# Altium PCB Arduino幻彩灯带.PcbDoc
Units mm, origin at the board's own origin, x right, y up, seen from the top; angles counter-clockwise.
Board outline 68.83 x 53.59 mm, 2 copper layers (Top Layer, Bottom Layer); 35 components, 34 nets, 125 pads, 205 vias.
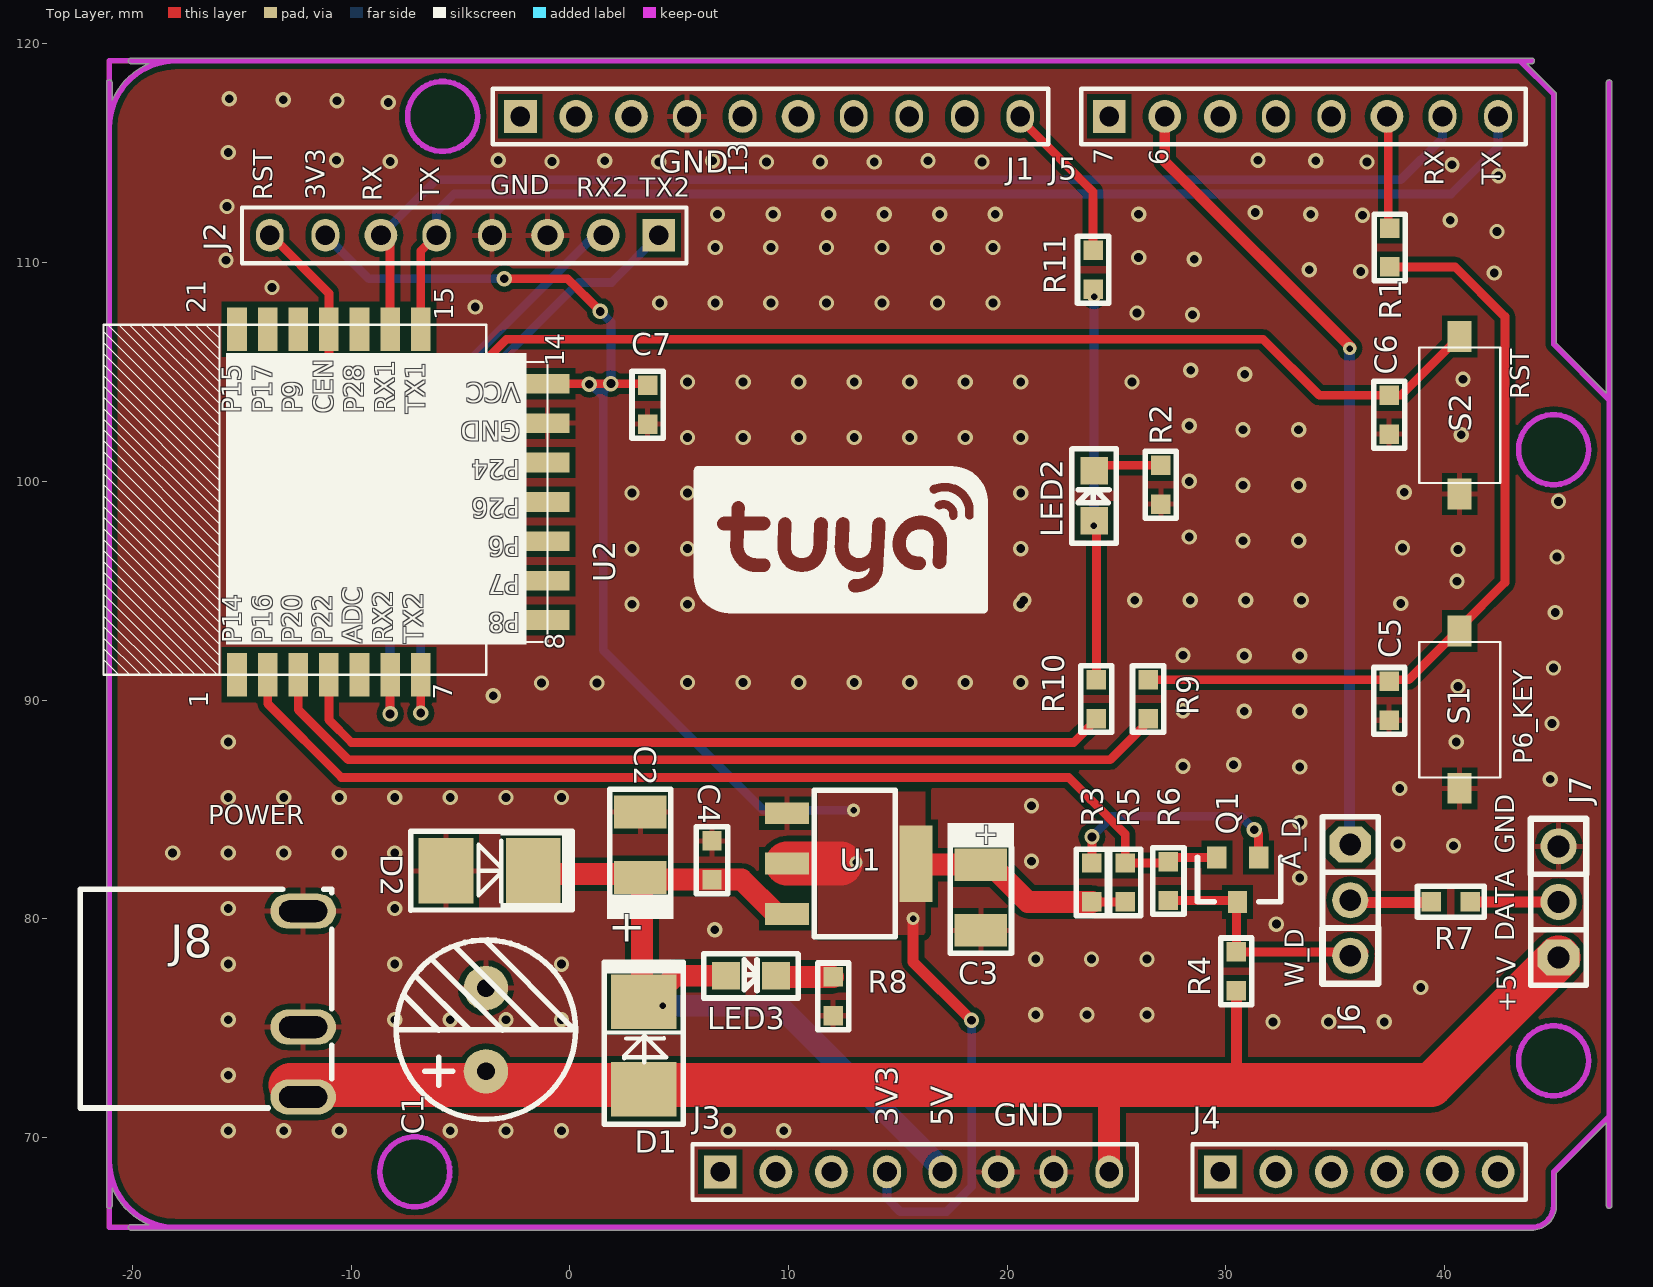
[diagram p0: Top Layer view]
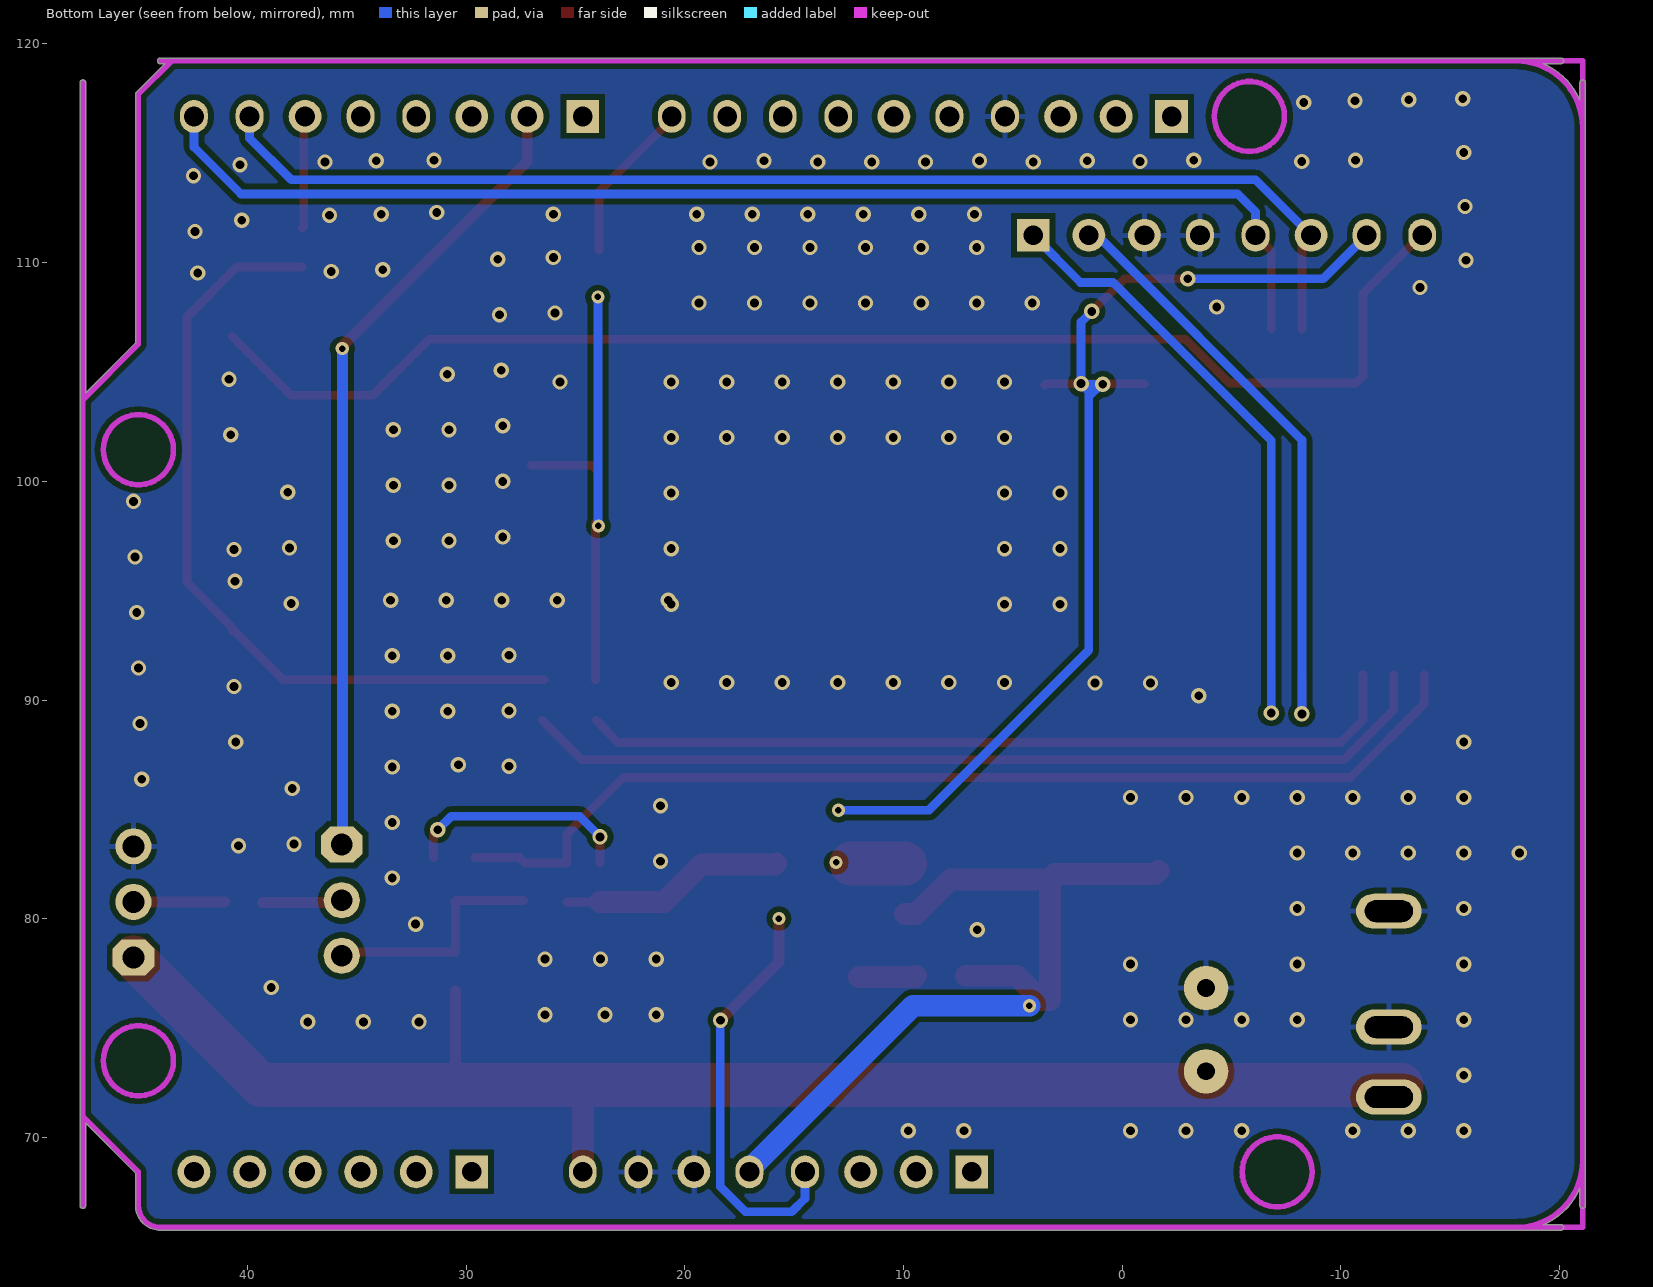
[diagram p1: Bottom Layer view, seen from below]

## Layer stack, top to bottom
Top Solder: solder mask 0.0102, Solder Resist, Dk 3.5
Top Layer: signal copper 0.0356
Dielectric1: dielectric 0.32, FR-4, Dk 4.8
Bottom Layer: signal copper 0.0356
Bottom Solder: solder mask 0.0102, Solder Resist, Dk 3.5

## Board outline
-21.184,66.888 ccw(c-21.057,66.888) -20.929,66.888 -20.929,67.689 ccw(c-18.009,68.936) -19.255,66.015 -20.057,66.015 ccw(c-20.057,65.888) -20.057,65.76 43.983,65.76 ccw(c43.983,66.888) 45.111,66.888 ccw(c44.983,66.888) 45.111,66.888 45.111,68.375 47.396,70.66 47.396,66.888 ccw(c47.523,66.888) 47.651,66.888 47.651,118.228 ccw(c47.523,118.228) 47.396,118.228 47.396,104.041 45.111,106.326 45.111,117.704 ccw(c44.983,117.704) 45.073,117.794 43.767,119.1 43.983,119.1 ccw(c43.983,119.228) 44.111,119.228 ccw(c43.983,119.228) 43.983,119.355 -20.057,119.355 ccw(c-20.057,119.228) -20.057,119.1 -19.255,119.1 ccw(c-18.009,116.18) -20.929,117.426 -20.929,118.228 ccw(c-21.057,118.228) -21.184,118.228

## Design rules (kind name [scope] priority, off if disabled: settings)
Clearance Clearance_1 [All] p1: gap=0.254 ignorepadtopadclearanceinfootprint=FALSE except(0: Arc-Hole Track-Hole SMDPad-Hole THPad-Hole Via-Hole Fill-Hole Poly-Hole Region-Hole Text-Hole)
Clearance [InNet('GND') vs InNetClass('All Nets')] p2: gap=0.203 ignorepadtopadclearanceinfootprint=FALSE except(0: Arc-Hole Track-Hole SMDPad-Hole THPad-Hole Via-Hole Fill-Hole Poly-Hole Region-Hole Text-Hole)
HoleSize [All] p1: absolutevalues=TRUE maxlimit=3 minlimit=0.025 maxpercent=80.000 minpercent=20.000
HoleToHoleClearance [All] p1: gap=0 allowstackedmicrovias=TRUE
MinimumSolderMaskSliver [All] p1: minsoldermaskwidth=0
PolygonConnect PolygonConnect_5 [InNet('+3.3V') vs IsPad] p1: connectstyle=Direct reliefconductorwidth=0.254 reliefentries=4 polygonreliefangle="90 Angle" airgapwidth=0.254
PolygonConnect PolygonConnect_4 [InNet('+3.3V') vs IsVia] p2: connectstyle=Direct reliefconductorwidth=0.254 reliefentries=4 polygonreliefangle="90 Angle" airgapwidth=0.254
PolygonConnect PolygonConnect_3 [InNet('+5V') vs IsVia] p3: connectstyle=Direct reliefconductorwidth=0.254 reliefentries=4 polygonreliefangle="90 Angle" airgapwidth=0.254
PolygonConnect PolygonConnect_2 [InNet('+5V') vs IsPad] p4: connectstyle=Direct reliefconductorwidth=0.254 reliefentries=4 polygonreliefangle="90 Angle" airgapwidth=0.254
PolygonConnect PolygonConnect_1 [InNet('GND') vs IsVia] p5: connectstyle=Direct reliefconductorwidth=0.254 reliefentries=4 polygonreliefangle="90 Angle" airgapwidth=0.254
PolygonConnect [All] p6: connectstyle=Relief reliefconductorwidth=0.254 reliefentries=4 polygonreliefangle="90 Angle" airgapwidth=0.254
RoutingVias [All] p1: holewidth=0.2 width=1.27 viastyle="Through Hole" minholewidth=0.2 minwidth=0.2 maxholewidth=1.2 maxwidth=1.27
SilkToSilkClearance [All] p1: silktosilkclearance=0
SilkToSolderMaskClearance SilkscreenOverComponentPads [IsPad] p1: minsilkscreentomaskgap=0 clearancetoexposedcopper=TRUE
SolderMaskExpansion [All] p1: expansion=0.102
Width [All] p1: maxlimit=6 minlimit=0.254 preferedwidth=0.254
25 further rules are at their usual default settings.

## Components (designator, comment, footprint, x,y, rotation, side; value= is the part's Value field where it differs from the comment)
C1 "220uF±20%/16V" CD0.15 -3.835,74.93 r90 top
C2 "22uF±20%/16V" 钽电容B3528 3.226,83.387 r90 top
C3 "22uF±20%/16V" 钽电容B3528 18.796,80.974 r270 top
C4 "0.1uF±20%/50V" C0603 6.502,81.788 r90 top
C5 "0.1uF±20%/16V" C0603 37.465,89.078 r90 top
C6 "0.1uF±20%/16V" C0603 37.465,103.937 r270 top
C7 "0.1uF±20%/16V" C0603 3.556,102.616 r90 top
D1 "SS210" SMA(DO-214AC) 3.378,74.2 r90 top
D2 "SMBJ05CA" SMB(DO-214AA) -3.664,82.194 r0 top
J1 "CON10" HDR1X10Z -2.261,116.688 r0 top
J2 "CON8" HDR1X8Z 4.064,111.252 r180 top
J3 "CON8" HDR1X8Z 6.883,68.428 r0 top
J4 "CON6" HDR1X6Z 29.743,68.428 r0 top
J5 "CON8" HDR1X8Z 24.663,116.688 r0 top
J6 "KF301-3P" "SIP3 - 2.54" 35.687,83.388 r270 top
J7 "KF301-3P" "SIP3 - 2.54" 45.212,78.232 r90 top
J8 "DCIN" DC-IN-TH_DC-044-20A -12.192,76.098 r270 top
LED2 "LED" LED0805_1 23.978,98.196 r90 top
LED3 "LED" LED0805_1 7.137,77.394 r0 top
Q1 "S8050" SOT-23-NPN 31.496,82.804 r180 top
R1 "0R±5%" R0603#1 37.49,111.582 r270 top
R2 "1K±5%" R0603#1 27.026,100.736 r270 top
R3 "2K±5%" R0603#1 23.876,80.772 r90 top
R4 "2K±5%" R0603#1 30.48,76.708 r90 top
R5 "2K±5%" R0603#1 25.4,80.772 r90 top
R6 "NC/0R" R0603#1 27.374,82.614 r270 top
R7 "1R±5%" R0603#1 39.395,80.772 r0 top
R8 "240R±5%" R0603#1 12.04,77.343 r270 top
R9 "0R±5%" R0603#2 25.044,91.313 r270 top
R10 "0R±5%" R0603#2 22.682,91.313 r270 top
R11 "0R±5%" R0603#2 25.324,108.407 r90 top
S1 "KEY_SW2" 3*6*2.5-SM 40.691,89.56 r90 top
S2 "KEY_SW2" 3*6*2.5-SM 40.691,103.022 r90 top
U1 "GM1117-3.3ST3T" SOT-223 12.878,82.525 r270 top
U2 "WIFI_BLE_CBU" WIFI_BLE_CBU -1.016,99.06 r90 top

## Footprints (in the part's own frame and the unit in brackets; to place one, negate y for a bottom-side part, rotate by r counter-clockwise, add the part's x,y. Pads: shape width x height; smd on the part's side, far side on the other; paste and mask are expansions set on the pad)
3*6*2.5-SM [mm]
  rect 1.4x1.1 smd: 1(-3.6,0) 2(3.6,0)
  silkscreen extent -3.1,-1.85 3.1,1.85
C0603 [mil]
  rect 35x35 smd: 1(0,0) 2(70,0)
  silkscreen extent -25,-28 95,28, body extent 4,-16 66,15, height 12
CD0.15 [mil]
  round 80 hole 32: 1(-75,0) 2(75,0)
  silkscreen extent -161,-161 161,161, body extent -156,-150 158,165, height 630
DC-IN-TH_DC-044-20A [mm] "11.5*9.5mm"
  oval 1.6x3 hole 1 slot 2.2 at 90 deg: 1(4.25,0) 2(-4.25,0) 3(1.05,0)
  silkscreen extent -5.25,-10.2 4.75,1.3
HDR1X6Z [mm] "Connector; Header; 5 Position"
  rect 1.5x1.5 hole 0.9: 1(0,0)
  round 1.5 hole 0.9: 2(2.54,0) 3(5.08,0) 4(7.62,0) 5(10.16,0) 6(12.7,0)
  silkscreen extent -1.27,-1.27 13.97,1.27, body extent -1.27,-1.25 13.97,1.25, height 8.65
HDR1X8Z [mm] "Connector; Header; 8 Position"
  rect 1.5x1.5 hole 0.9: 1(0,0)
  round 1.5 hole 0.9: 2(2.54,0) 3(5.08,0) 6(12.7,0)
  oval 1.27x1.5 hole 0.9: 4(7.62,0) 5(10.16,0) 7(15.24,0) 8(17.78,0)
  silkscreen extent -1.27,-1.27 19.05,1.27, body extent -1.27,-1.25 19.05,1.25, height 8.65
HDR1X10Z [mm] "Connector; Header; 10 Position"
  rect 1.5x1.5 hole 0.9: 1(0,0)
  round 1.5 hole 0.9: 2(2.54,0) 3(5.08,0) 6(12.7,0)
  oval 1.27x1.5 hole 0.9: 4(7.62,0) 5(10.16,0) 7(15.24,0) 8(17.78,0) 9(20.32,0) 10(22.86,0)
  silkscreen extent -1.27,-1.27 24.13,1.27, body extent -1.27,-1.25 24.13,1.25, height 8.65
LED0805_1 [mil]
  rect 50x50 smd: 1(0,0) 2(90,0)
  silkscreen extent -40,-40 130,40, body extent 6,-25 84,24, height 30
R0603#1 [mil]
  rect 35x35 smd: 1(0,0) 2(70,0)
  silkscreen extent -25,-28 95,28, body extent 2,-16 65,16, height 18
R0603#2 [mil]
  rect 35x35 smd: 1(85,55) 2(15,55)
  silkscreen extent -10,27 110,83, body extent 20,39 83,71, height 18
"SIP3 - 2.54" [mil]
  oct 65x75 hole 39.37: 1(0,0)
  round 65 hole 39.37: 2(100,0) 3(200,0)
  silkscreen extent -50,-50 250,50
SMA(DO-214AC) [mm]
  rect 2.5x3 smd: 1(-2,0) 2(2,0)
  silkscreen extent -3.6,-1.84 3.94,1.83, body extent -2.21,-1.38 2.46,1.27, height 2.35
SMB(DO-214AA) [mm]
  rect 2.5x3 smd: 1(-2,0) 2(2,0)
  silkscreen extent -3.6,-1.8 3.91,1.82, body extent -2.28,-1.33 2.39,1.32, height 2.35
SOT-23-NPN [mil]
  rect 35x40 smd: 1(75,0) 2(0,0) 3(38,80)
  silkscreen extent -40,0 110,80, body extent -17,-17 97,80, height 39
SOT-223 [mm]
  rect 1x2 smd: 1(-2.3,-2.95) 2(0,-2.95) 3(2.3,-2.95)
  rect 3.5x1.5 smd: 2(0,2.95)
  silkscreen extent -3.35,-1.71 3.35,1.99, body extent -3.29,-3.55 3.21,3.41, height 1.65
WIFI_BLE_CBU [mm]
  rect 2x0.9 smd: 1(-7.9,14.2) 2(-7.9,12.8) 3(-7.9,11.4) 4(-7.9,10) 5(-7.9,8.6) 6(-7.9,7.2) 7(-7.9,5.8) 15(7.9,5.8) 16(7.9,7.2) 17(7.9,8.6) 18(7.9,10) 19(7.9,11.4) 20(7.9,12.8) 21(7.9,14.2)
  rect 0.9x2 smd: 8(-5.4,0) 9(-3.6,0) 10(-1.8,0) 11(0,0) 12(1.8,0) 13(3.6,0) 14(5.4,0)
  silkscreen extent -7.9,0 8.14,20.33
钽电容B3528 [mm]
  rect 1.5x2.4 smd: 1(-1.5,0) 2(1.5,0)
  silkscreen extent -3.4,-1.52 2.54,1.52

## Part data
C1 C2 C3: library part "CAPACITOR POL", "Capacitor"
C4 C5 C6 C7: library part CAP, "Capacitor"
D1: library part Diode1, "Diode"
D2: library part "D Schottky", "Schottky Diode", MFR=Toshiba
J1 J2 J3 J4 J5: "Connector"
J6 J7: library part CON3, "Connector"
J8: library part DC
Q1: library part NPN, "NPN Transistor"
R1 R2 R3 R4 R5 R6 R7 R8 R9 R10 R11: library part RES5
U1: library part GM1117
U2: "Module"

## Via types
v1: diameter 0.7, hole 0.4, Top Layer to Bottom Layer, tented both sides, 198 vias
v2: diameter 0.6, hole 0.3, Top Layer to Bottom Layer, 7 vias

## Nets (pads, with @x,y where several pads share a name; then routed paths per layer and width w, separated by ;. In a path a pad name is that pad's centre, name@x,y a point inside that pad or via, vN(x,y) a via of type N, cw(c..) or ccw(c..) an arc to the next point about the centre after c; other vN are vias at no path point)
+3.3V: C3.1 C7.2 J2.7 J3.4 R3.1 R5.1 U1.2 U2.14 | length 82.6
  Top Layer w0.4: v1(-2.997,109.271) -0.102,109.271 v1(1.397,107.772) ; U2.14 3.49,104.46 C7.2 ; R3.1 R5.1
  Top Layer w0.5: v2(15.697,80.01) 15.697,78.029 v1(18.364,75.362)
  Top Layer w1: U1.2@15.828,82.525 15.879,82.474 C3.1 19.246,82.474 20.948,80.772 R3.1
  Top Layer w2: U1.2@9.928,82.525 12.395,82.525
  Bottom Layer w0.4: J2.7 -9.195,109.271 v1(-2.997,109.271) ; v1(0.889,104.445) v1@0.965,104.445 ; v1(1.397,107.772) 1.88,107.29 v1@1.88,104.521 ; v1(1.88,104.47) v1@1.854,104.445 ; v2(12.979,84.963) 8.839,84.963 1.524,92.278 1.524,103.886 ; J3.4 14.503,67.208 15.113,66.599 17.221,66.599 18.379,67.757 18.379,75.347 v1(18.364,75.362) ; v1@0.965,104.445 v1@1.854,104.445 ; v1@0.965,104.445 1.524,103.886 ; 1.524,103.886 1.524,104.115 v1@1.854,104.445
  other v2: 13.081,82.575
+5V: C1.1 D1.1 J3.8 J7.1 J8.1 R4.1 | length 68.9
  Top Layer w0.3: C1.1 C1.1@-3.581,72.771
  Top Layer w0.5: 30.48,72.669 R4.1
  Top Layer w1: C1.1@-3.891,72.969 C1.1 ; J3.8 24.663,72.399
  Top Layer w2: J8.1@-12.776,72.399 24.663,72.399 39.379,72.399 J7.1
+5VF: C2.1 C4.1 D1.2 D2.2 J3.5 LED3.1 U1.3 | length 38.3
  Top Layer w1: D2.2 -1.51,82.041 3.072,82.041 C2.1 C2.1@3.302,81.811 ; LED3.1 4.822,77.394 3.704,76.276 3.302,76.276 C2.1@3.302,81.811 ; U1.3 9.428,80.225 7.864,81.788 C4.1 3.325,81.788 C2.1@3.302,81.811
  Bottom Layer w1: v2(4.242,76.022) 9.564,76.022 17.043,68.543 J3.5
ADC: U2.5
GND: C1.2 C2.2 C3.2 C4.2 C5.1 C6.2 C7.1 D2.1 J1.4 J2.3 J2.4 J3.6 J3.7 J7.3 J8.2 J8.3 R2.2 R8.2 S1.1 S2.1 U1.1 U2.13
  other v1: -15.621,70.307 -13.081,70.307 -10.541,70.307 -5.461,70.307 -2.921,70.307 -0.381,70.307 7.239,70.307 9.779,70.307 -15.621,72.847 32.156,75.286 34.696,75.286 37.236,75.286 -15.621,75.387 -8.001,75.387 -5.461,75.387 -2.921,75.387 -0.381,75.387 21.311,75.616 23.647,75.616 26.391,75.616 38.913,76.86 -15.621,77.927 -8.001,77.927 -0.381,77.927 21.311,78.156 23.851,78.156 26.391,78.156 6.629,79.502 32.309,79.756 -15.621,80.467 -8.001,80.467 33.376,81.864 21.107,82.626 -18.161,83.007 -15.621,83.007 -13.081,83.007 -10.541,83.007 -8.001,83.007 40.411,83.337 37.871,83.414 33.376,84.404 21.107,85.166 -15.621,85.547 -13.081,85.547 -10.541,85.547 -8.001,85.547 -5.461,85.547 -2.921,85.547 -0.381,85.547 37.948,85.954 44.831,86.385 33.376,86.944 28.042,86.97 30.353,87.046 -15.621,88.087 40.538,88.08 44.907,88.925 30.836,89.484 33.376,89.484 28.042,89.51 -3.505,90.195 40.615,90.62 -1.295,90.78 -1.295,90.78 1.245,90.78 5.385,90.805 7.925,90.805 7.925,90.805 10.465,90.805 13.005,90.805 15.545,90.805 18.085,90.805 20.625,90.805 44.983,91.465 30.836,92.024 33.376,92.024 28.042,92.05 45.06,94.005 2.845,94.386 5.385,94.386 20.625,94.386 37.998,94.419 20.752,94.564 25.832,94.564 28.372,94.564 30.912,94.564 33.452,94.564 40.564,95.428 45.136,96.545 40.615,96.882 2.845,96.926 5.385,96.926 20.625,96.926 38.075,96.959 30.785,97.282 33.325,97.282 28.321,97.46 45.212,99.085 2.845,99.466 5.385,99.466 20.625,99.466 38.151,99.499 30.785,99.822 33.325,99.822 28.321,100 5.385,102.006 5.385,102.006 7.925,102.006 10.465,102.006 13.005,102.006 15.545,102.006 18.085,102.006 20.625,102.006 40.767,102.133 30.785,102.362 33.325,102.362 28.321,102.54 5.385,104.546 5.385,104.546 7.925,104.546 10.465,104.546 13.005,104.546 15.545,104.546 15.545,104.546 18.085,104.546 20.625,104.546 25.705,104.546 40.843,104.673 30.861,104.902 28.397,105.08 28.473,107.62 25.933,107.696 -4.318,107.975 4.115,108.153 4.115,108.153 6.655,108.153 9.195,108.153 11.735,108.153 14.275,108.153 16.815,108.153 19.355,108.153 -13.614,108.864 42.266,109.525 36.17,109.601 33.807,109.677 -15.723,110.109 28.55,110.16 26.01,110.236 6.655,110.693 9.195,110.693 11.735,110.693 14.275,110.693 16.815,110.693 19.355,110.693 42.393,111.43 40.259,111.938 36.246,112.166 6.756,112.217 9.296,112.217 11.836,112.217 14.376,112.217 16.916,112.217 19.456,112.217 26.01,112.217 33.884,112.217 31.344,112.293 -15.672,112.573 42.469,113.97 40.335,114.478 4.064,114.605 8.992,114.605 11.455,114.605 13.919,114.605 18.847,114.605 36.449,114.605 -8.204,114.63 -0.813,114.63 1.6,114.656 6.528,114.656 16.383,114.656 34.112,114.656 -10.668,114.681 -3.277,114.681 31.471,114.681 -15.621,115.037 -8.306,117.323 -10.643,117.399 -13.106,117.45 -15.57,117.5
NetC5_2: C5.2 R1.2 R9.2 S1.2 | length 36.7
  Top Layer w0.4: R9.2 38.354,90.932 S1.2@40.691,93.269 ; R1.2 40.488,109.804 42.758,107.534 42.758,95.378 40.691,93.31 S1.2@40.691,93.269 ; S1.2 S1.2@40.691,93.269
NetJ7_2: J7.2 R7.2 | length 4.2
  Top Layer w0.5: R7.2@41.021,80.772 R7.2 J7.2
NetLED2_1: LED2.1 R10.2 R11.2 | length 17.8
  Top Layer w0.4: LED2.1 24.079,98.095 R10.2
  Bottom Layer w0.4: v2(23.952,97.968) 23.965,97.98 23.965,108.42 v2(23.978,108.433)
NetLED2_2: LED2.2 R2.1 | length 3.2
  Top Layer w0.4: LED2.2 24.232,100.736 R2.1
NetLED3_2: LED3.2 R8.1 | length 2.6
  Top Layer w1: LED3.2 9.474,77.343 R8.1
NetQ1_2: Q1.2 R3.2 | length 10.6
  Top Layer w0.4: R3.2 v1(23.876,83.744) ; v1(31.293,84.074) 31.496,83.871 Q1.2
  Bottom Layer w0.4: v1(23.876,83.744) 24.816,84.684 30.683,84.684 v1(31.293,84.074)
OUT_DATA: Q1.1 R5.2 R6.1 U2.2 | length 48.7
  Top Layer w0.4: U2.2 -13.816,89.838 -10.439,86.462 22.809,86.462 23.812,85.458 25.4,83.871 R5.2 R6.1@27.309,82.55 ; R6.1 R6.1@27.309,82.55 ; Q1.1 27.563,82.804 R6.1@27.309,82.55
OUT_RGB: J6.2 R7.1 | length 3.4
  Top Layer w0.5: J6.2@35.89,80.747 R7.1@39.319,80.747
OUT_RGB_ARD: J5.2 J6.1 | length 36.8
  Top Layer w0.5: J5.2 27.203,114.63 v2@35.712,106.121
  Bottom Layer w0.5: J6.1@35.662,83.388 v2(35.662,106.07)
OUT_RGB_CBU: J6.3 Q1.3 R4.2 R6.2 | length 11.3
  Top Layer w0.4: R6.2 30.466,80.836 Q1.3 30.48,80.721 R4.2 J6.3@36.322,78.486
P6: U2.10
P6_KEY1: R9.1 U2.3 | length 42.2
  Top Layer w0.4: U2.3 -12.416,89.556 -10.135,87.274 24.714,87.274 R9.1@26.518,89.078
P7: U2.9
P8: U2.8
P9: U2.19
P14: U2.1
P15: U2.21
P17: U2.20
P22: R10.1 U2.4 | length 38
  Top Layer w0.4: U2.4 -11.016,89.096 -9.982,88.062 23.038,88.062 R10.1@24.054,89.078
P24: U2.12
P26: U2.11
P28: U2.17
RST: C6.1 J2.8 S2.2 U2.18 | length 62.4
  Top Layer w0.4: J2.8 -13.665,111.252 -11.016,108.603 U2.18 -11.016,104.818 -10.693,104.496 -4.902,104.496 -2.896,106.502 31.699,106.502 34.265,103.937 C6.1 38.005,103.937 S2.2
RX2: J2.2 U2.6 | length 27.9
  Top Layer w0.4: v1(-8.216,89.369) U2.6
  Bottom Layer w0.4: v1(-8.216,89.369) -8.216,101.893 1.143,111.252 J2.2
TX2: J2.1 U2.7 | length 29
  Top Layer w0.4: v1(-6.816,89.408) U2.7
  Bottom Layer w0.4: v1(-6.816,89.408) -6.816,101.871 0.406,109.093 1.905,109.093 J2.1
Wifi_key: J5.6 R1.1 | length 5.2
  Top Layer w0.4: J5.6 37.427,116.624 37.427,111.646 R1.1
Wifi_led: J1.10 R11.1 | length 7.5
  Top Layer w0.4: J1.10 20.599,116.573 23.927,113.245 R11.1
WRX: J2.6 J5.7 U2.16 | length 55.8
  Top Layer w0.4: J2.6 -8.216,110.832 U2.16
  Bottom Layer w0.4: J2.6 -6.096,113.792 37.998,113.792 39.903,115.697 J5.7
WTX: J2.5 J5.8 U2.15 | length 56.8
  Top Layer w0.4: U2.15 -6.816,110.532 J2.5
  Bottom Layer w0.4: J2.5 -6.096,112.325 -5.283,113.138 40.291,113.138 42.443,115.291 J5.8
pads on no net: J1.1 J1.2 J1.3 J1.5 J1.6 J1.7 J1.8 J1.9 J3.1 J3.2 J3.3 J4.1 J4.2 J4.3 J4.4 J4.5 J4.6 J5.1 J5.3 J5.4 J5.5

## Polygon pours and split planes (outlines as drawn)
GND on Top Layer "Top Layer-GND" (solid, remove dead copper, pour order 1016): -31.521,127.686 -30.429,126.594 48.768,126.594 48.768,59.893 48.311,59.436 46.888,60.858 -34.265,60.858 -34.265,124.384 -31.191,127.457
+3.3V on Top Layer "Top Layer-+3.3V" (solid, pour order 1008): 11.278,85.877 11.354,85.801 16.256,85.801 16.256,79.248 16.231,79.223 16.18,79.273 11.328,79.273 11.328,85.801 11.303,85.827
GND on Bottom Layer "Bottom Layer-GND" (solid, remove dead copper, pour order 1018): -29.566,126.924 -27.94,128.549 50.394,128.549 50.394,60.325 48.641,58.572 47.219,59.995 -32.741,59.995 -32.741,123.723 -27.686,128.778

## Keep-outs
Keep-Out Layer:
  circle w0.254: c44.983,73.508 r1.6
  circle w0.254: c-5.817,116.688 r1.6
  circle w0.254: c-7.087,68.428 r1.6
  circle w0.254: c44.983,101.448 r1.6
  lines w0.254: -21.057,66.888 -21.057,118.228 -21.057,119.228 -19.787,119.228 ; -21.057,67.31 -21.057,65.888 -19.787,65.888 ; -21.057,68.936 ccw(c-18.009,68.936) -18.009,65.888 ; -21.057,116.18 cw(c-18.009,116.18) -18.009,119.228 ; -20.057,65.888 43.983,65.888 ccw(c43.983,66.888) 44.983,66.888 44.983,68.428 47.523,70.968 ; -20.057,119.228 43.983,119.228 ; 43.459,119.228 44.983,117.704 44.983,106.274 47.523,103.734 ; 47.523,66.888 47.523,118.228

## Silkscreen, mask and mechanical layers (free items; w line width, h text height)
Top Overlay:
  drawing of 1209 lines, arcs and shapes, not listed
  text "7" at 25.121,114.478 h1.5 r90
  text "6" at 27.661,114.452 h1.5 r90
  text "GND" at 4.064,114.122 h1.02
  text "13" at 8.407,113.919 h1.5 r90
  text "TX" at 42.875,113.563 h1.5 r90
  text "RX" at 40.259,113.513 h1.5 r90
  text "3V3" at -10.897,112.878 h1.5 r90
  text "RST" at -13.31,112.852 h1.5 r90
  text "TX" at -5.664,112.852 h1.5 r90
  text "GND" at -3.632,112.827 h1.5
  text "RX" at -8.306,112.801 h1.5 r90
  text "RX2" at 0.305,112.725 h1.5
  text "TX2" at 3.2,112.725 h1.5
  text "RST" at 44.171,103.759 h1.5 r90
  text "P6_KEY" at 44.298,87.071 h1.5 r90
  text "POWER" at -16.535,84.023 h1.5
  text "GND" at 43.485,82.982 h1.5 r90
  text "A_D" at 33.731,82.271 h1.5 r90
  text "DATA" at 43.485,78.969 h1.5 r90
  text "W_D" at 33.858,76.86 h1.5 r90
  text "+5V" at 43.561,75.692 h1.5 r90
  text "GND" at 19.38,70.536 h1.02
  text "3V3" at 14.986,70.51 h1.02 r90
  text "5V" at 17.501,70.51 h1.02 r90

## Dimensions
-19.787,119.228 to -20.057,65.888 on Top Overlay
47.523,118.228 to -21.057,118.228 on Top Overlay

## Text inside footprints (layer, text, board x,y; h text height)
C2: Top Overlay "+" at 3.48,80.212 h1.5 r180
C3: Top Overlay "+" at 18.466,83.412 h1
U2: Top Overlay "P15" at -14.757,103.126 h1.5 r90; Top Overlay "P17" at -13.339,103.126 h1.5 r90; Top Overlay "P9" at -11.952,103.126 h1.5 r90; Top Overlay "CEN" at -10.549,103.126 h1.5 r90; Top Overlay "P28" at -9.146,103.126 h1.5 r90; Top Overlay "RX1" at -7.727,103.126 h1.5 r90; Top Overlay "TX1" at -6.325,103.126 h1.5 r90; Top Overlay "GND" at -2.261,103.022 h1.5 r180; Top Overlay "VCC" at -2.262,104.775 h1.5 r180; Top Overlay "TX2" at -6.426,92.608 h1.5 r90; Top Overlay "RX2" at -7.825,92.608 h1.5 r90; Top Overlay "ADC" at -9.207,92.608 h1.5 r90; Top Overlay "P22" at -10.589,92.608 h1.5 r90; Top Overlay "P20" at -11.971,92.608 h1.5 r90; Top Overlay "P16" at -13.338,92.608 h1.5 r90; Top Overlay "P14" at -14.736,92.608 h1.5 r90; Top Overlay "21" at -16.358,107.696 h1.5 r90; Top Overlay "1" at -16.236,89.66 h1.5 r90; Top Overlay "P24" at -2.261,101.254 h1.5 r180; Top Overlay "P26" at -2.261,99.501 h1.5 r180; Top Overlay "P6" at -2.261,97.753 h1.5 r180; Top Overlay "P7" at -2.261,96.012 h1.5 r180; Top Overlay "P8" at -2.261,94.259 h1.5 r180; Top Overlay "7" at -5.085,90.016 h1.5 r90; Top Overlay "8" at 0.051,92.304 h1.5 r90; Top Overlay "14" at 0.051,105.258 h1.5 r90; Top Overlay "15" at -5.029,107.366 h1.5 r90